# EAGLE board 1A) power supply (EAGLE 9.6.2)
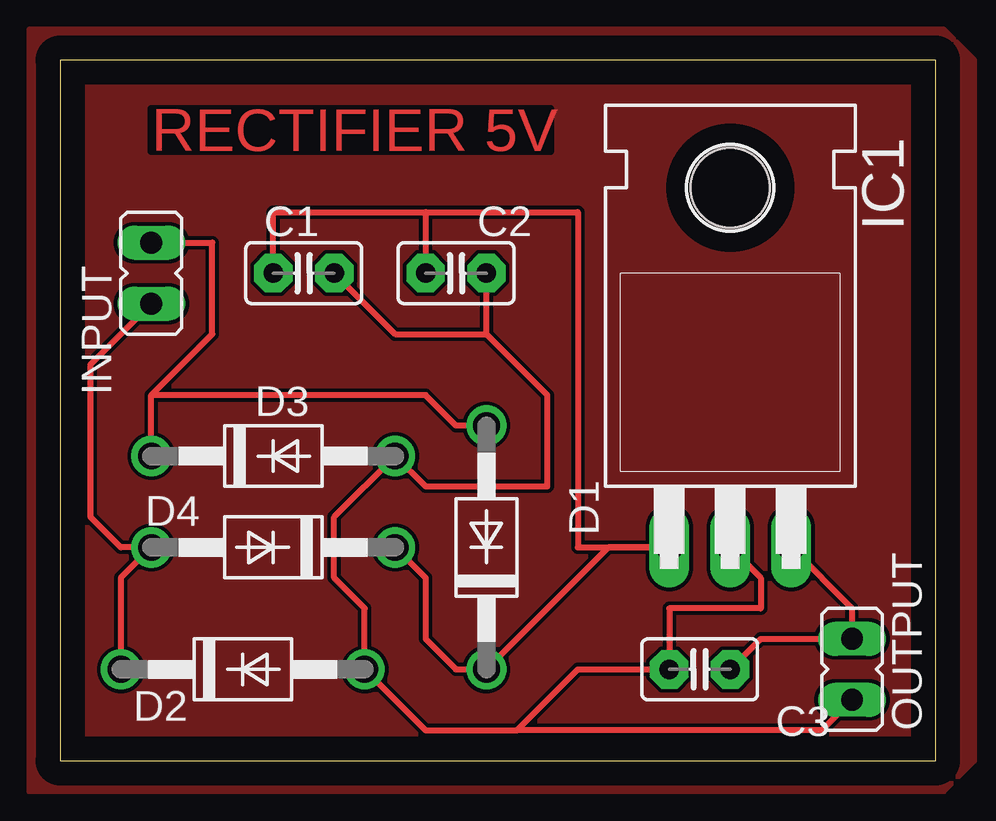
[diagram p0: board, top side]
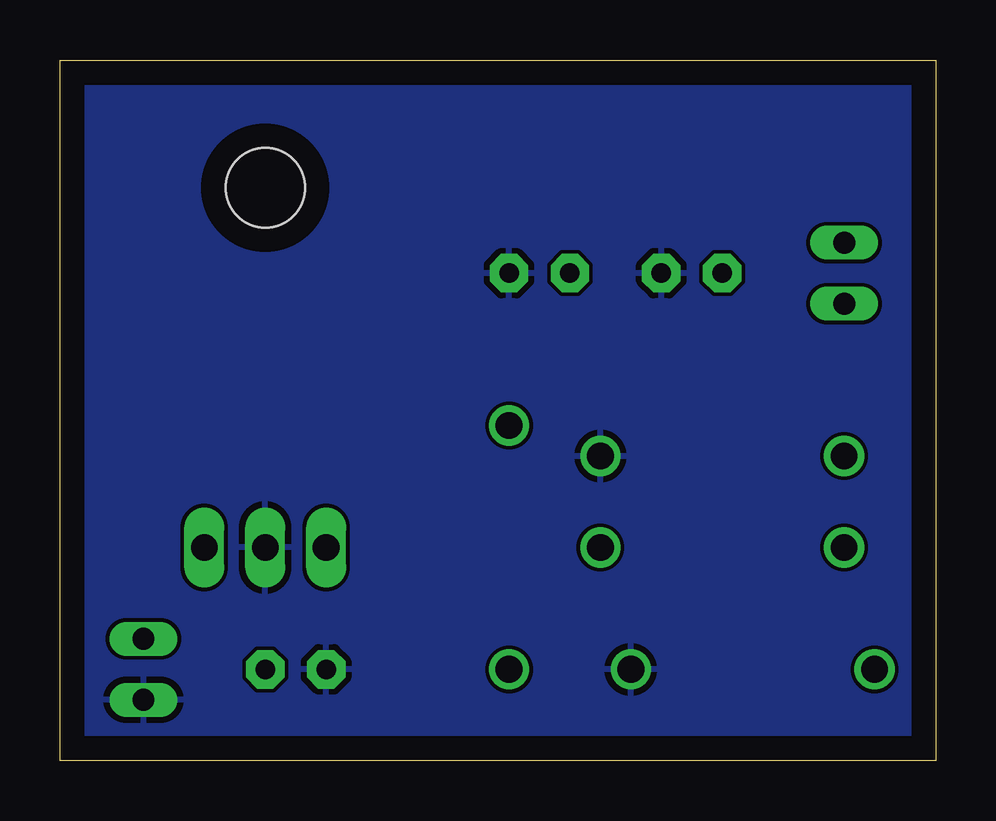
[diagram p1: board, bottom side, seen from below]

Size 36.5 x 29.2 mm. Coordinates in mm from the lower left corner, seen from the top.
Outline: 0,0 36.5,0 36.5,29.2 0,29.2 0,0
Copper layers (1*16): Top 0.035mm / dielectric 1.5mm / Bottom 0.035mm
Design rules "default": minimum track width 6mil, minimum drill 0.35mm, track to track 6mil, track to pad 6mil, pad to pad 6mil, via to via 6mil, smd to smd 6mil, copper to edge 40mil, drill to drill 6mil, minimum pad ring 10mil, minimum via ring 8mil, stop-mask expansion 4mil, vias tented up to drill 0mil, thermal gap 10mil

## Footprints (pad centres in the part's own frame; a part is rotated, then mirrored left to right if it is on the bottom)
C2.5-2 = drill 0.813 pad 1.6 octagon: 1 -1.27,0; 2 1.27,0
DO41-10 = drill 1.118: A 5.08,0; C -5.08,0
TO220H = drill 1.118 long: 1 -2.54,-10.16; 2 0,-10.16; 3 2.54,-10.16 | hole 3.302: 0,4.826
JP1 = drill 0.914 long: 1 0,-1.27; 2 0,1.27

## Placement (x,y rotation side)
C1  470uf  [C2.5-2]  10.16,20.32 0 top
C2  0.1uf  [C2.5-2]  16.51,20.32 0 top
C3  0.1uf  [C2.5-2]  26.67,3.81 180 top
D1  1N4004  [DO41-10]  17.78,8.89 90 top
D2  1N4004  [DO41-10]  7.62,3.81 0 top
D3  1N4004  [DO41-10]  8.89,12.7 0 top
D4  1N4004  [DO41-10]  8.89,8.89 180 top
IC1  7805T  [TO220H]  27.94,19.05 0 top
INPUT  12v  [JP1]  3.81,20.32 0 top
OUTPUT  5v  [JP1]  33.02,3.81 180 top

## Library data of the parts
C1-C3 = capacitor-wima
D1-D4 = diode
IC1 = linear
INPUT OUTPUT = jumper

## Nets
GND: C1.2 C2.2 C3.2 D2.A D3.A IC1.2 OUTPUT.2
N$1: D1.A D3.C INPUT.2
N$3: D2.C D4.A INPUT.1
N$4: C1.1 C2.1 D1.C D4.C IC1.1
N$6: C3.1 IC1.3 OUTPUT.1

## Tracks (layer width: path | path; a pad name or v marks a point on that pad's centre or on a via)
GND
  Top 0.254: C1.2 13.97,17.78 17.78,17.78 | 17.78,17.78 C2.2 | 19.05,1.27 15.24,1.27 D2.A 12.7,6.35 11.43,7.62 11.43,10.16 D3.A 15.24,11.43 20.32,11.43 20.32,15.24 17.78,17.78 | 19.05,1.27 21.59,3.81 C3.2 25.4,6.35 29.21,6.35 29.21,7.62 IC1.2 | OUTPUT.2 31.75,1.27 19.05,1.27
  pour Bottom: 0,30.48 36.83,30.48 38.1,29.21 38.1,0 36.83,-1.27 -1.27,-1.27 -1.27,29.21
N$1
  Top 0.254: INPUT.2 6.35,21.59 6.35,17.78 3.81,15.24 | D3.C 3.81,15.24 | D1.A 16.51,13.97 15.24,15.24 3.81,15.24
N$3
  Top 0.254: INPUT.1 1.27,16.51 1.27,10.16 2.54,8.89 D4.A 2.54,7.62 D2.C
N$4
  Top 0.254: C1.1 8.89,22.86 15.24,22.86 | 15.24,22.86 C2.1 | 15.24,22.86 21.59,22.86 21.59,8.89 IC1.1 22.86,8.89 D1.C 16.51,3.81 15.24,5.08 15.24,7.62 D4.C
N$6
  Top 0.254: 34.29,5.08 OUTPUT.1 | C3.1 29.21,5.08 OUTPUT.1 | IC1.3 33.02,6.35 OUTPUT.1
VSS
  pour Top: -1.27,30.48 36.83,30.48 38.1,29.21 38.1,0 36.83,-1.27 -1.27,-1.27

## Text on the board
Top: RECTIFIER 5V